# Altium PCB Board_QFP.PcbDoc (part 3 of 4)
Units mm, origin at the board's own origin, x right, y up, seen from the top; angles counter-clockwise.
Board outline 237 x 100 mm, 2 copper layers (Top Layer, Bottom Layer); 389 components, 358 nets, 1412 pads, 469 vias.
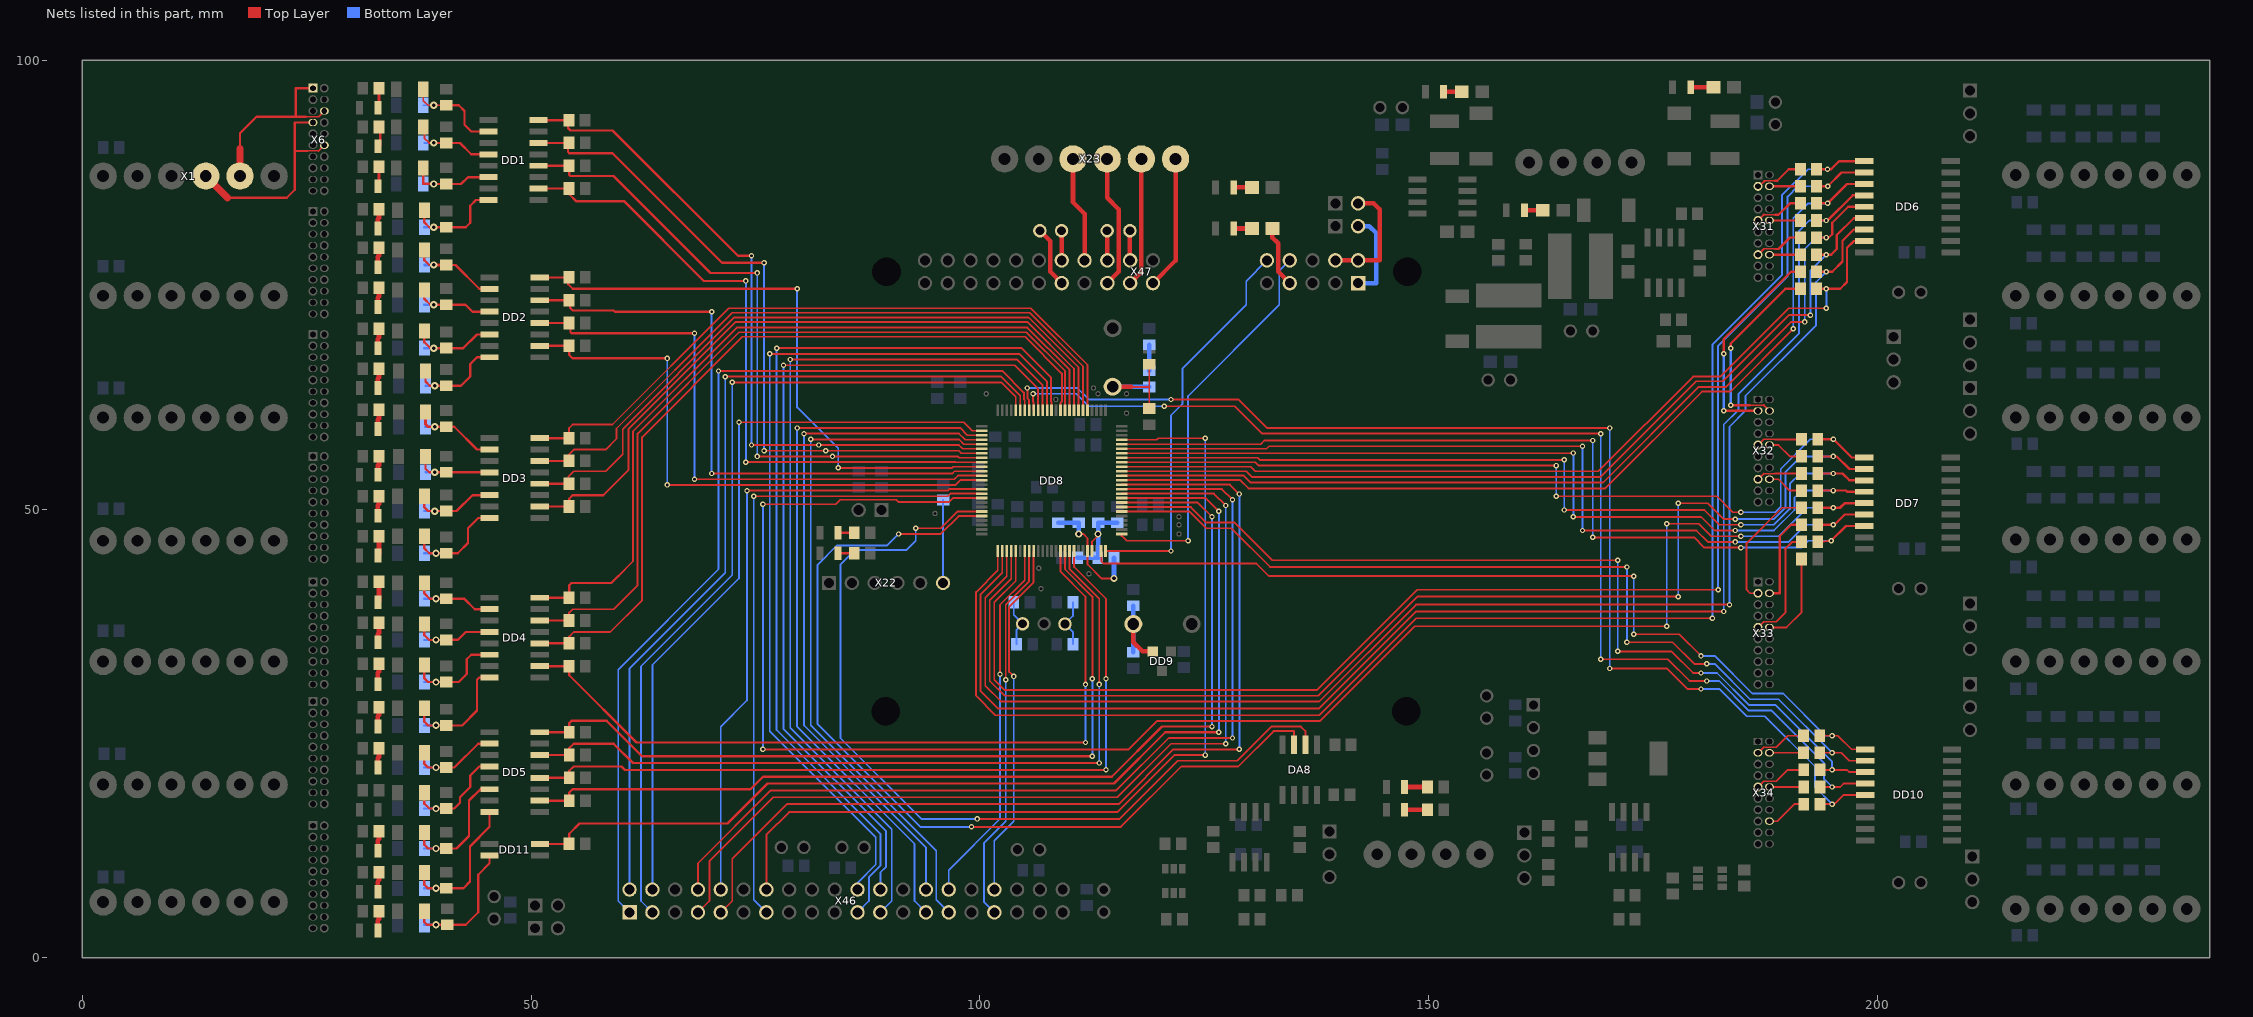
[diagram p3: the nets of this part, all layers, seen from the top]

## Via types
v1: diameter 0.6, hole 0.3, Top Layer to Bottom Layer, 149 vias
v2: diameter 0.813, hole 0.406, Top Layer to Bottom Layer, 130 vias
v3: diameter 1, hole 0.6, Top Layer to Bottom Layer, 118 vias
v4: diameter 1.016, hole 0.61, Top Layer to Bottom Layer, 72 vias

## Nets (pads, with @x,y where several pads share a name; then routed paths per layer and width w, separated by ;. In a path a pad name is that pad's centre, name@x,y a point inside that pad or via, vN(x,y) a via of type N, cw(c..) or ccw(c..) an arc to the next point about the centre after c; other vN are vias at no path point) (continued)
pa1: DD8.24 DD10.1 R99.1 | length 100.1
  Top Layer w0.203: DD8.24@113.481,45.339 113.538,45.282 113.538,44.196 113.792,43.942 130.81,43.942 132.207,42.545 v1(172.847,42.545) ; v1(172.847,36.068) 177.927,36.068 v1(180.34,33.655) ; R99.1@193.57,24.765 v1(194.945,24.765) 195.59,24.765 197.109,23.246 DD10.1@198.649,23.246
  Bottom Layer w0.203: v1(172.847,36.068) v1(172.847,42.545) ; v1(180.34,33.655) 181.864,33.655 186.055,29.464 189.484,29.464 194.183,24.765 v1(194.945,24.765)
pa2: DD8.25 X47.10 | length 44.1
  Top Layer w0.203: DD8.25@113.981,45.339 v1(121.285,45.339)
  Bottom Layer w0.203: v1(121.285,45.339) 121.285,60.452 122.555,61.722 122.555,65.659 129.667,72.771 129.667,75.422 X47.10@131.974,77.729
pa3: DD8.26 X47.8 | length 43.8
  Top Layer w0.203: DD8.26@115.781,47.239 115.781,47.033 116.332,46.482 v1(123.19,46.482)
  Bottom Layer w0.203: v1(123.19,46.482) 123.19,62.611 133.35,72.771 133.35,76.565 X47.8@134.514,77.729
pa4: 
pa5: 
pa6: DD8.31 DD10.2 R100.1 | length 100.7
  Top Layer w0.203: DD8.31@115.781,49.739 123.362,49.739 125.222,47.879 128.016,47.879 132.334,43.561 v1(172.085,43.561) ; v1(172.085,35.179) 177.165,35.179 179.578,32.766 v1(180.975,32.766) ; R100.1@193.57,22.86 v1(194.945,22.86) 195.971,22.86 196.855,21.976 DD10.2@198.649,21.976
  Bottom Layer w0.203: v1(172.085,35.179) v1(172.085,43.561) ; v1(180.975,32.766) 181.864,32.766 185.801,28.829 188.976,28.829 v1(194.945,22.86)
pa7: DD8.32 DD10.3 R168.1 | length 102.9
  Top Layer w0.203: DD8.32@115.781,50.239 123.497,50.239 125.222,48.514 128.397,48.514 132.588,44.323 v1(171.069,44.323) ; v1(171.069,34.163) 177.038,34.163 179.451,31.75 v1(180.34,31.75) ; R168.1@193.597,20.955 v1(194.945,20.955) 196.606,20.955 196.855,20.706 DD10.3@198.649,20.706
  Bottom Layer w0.203: v1(171.069,34.163) v1(171.069,44.323) ; v1(180.34,31.75) 182.118,31.75 185.674,28.194 188.595,28.194 194.945,21.844 v1(194.945,20.955)
pa8: DD8.67 DD10.4 R169.1 | length 130
  Top Layer w0.203: v1(105.918,62.865) 105.918,61.976 105.981,61.913 DD8.67@105.981,61.039 ; v1(120.523,61.468) 128.397,61.468 131.445,58.42 v1(169.164,58.42) ; v1(169.164,33.274) 176.657,33.274 179.07,30.861 v1(180.975,30.861) ; R169.1@193.595,19.048 v1(194.945,19.048) 195.832,19.048 196.22,19.436 DD10.4@198.649,19.436
  Bottom Layer w0.203: v1(105.918,62.865) 110.744,62.865 112.141,61.468 v1(120.523,61.468) ; v1(169.164,33.274) v1(169.164,58.42) ; v1(180.975,30.861) 182.372,30.861 185.674,27.559 188.214,27.559 194.056,21.717 194.056,19.937 v1(194.945,19.048)
pa9: DD8.68 DD10.5 R170.1 | length 133.9
  Top Layer w0.203: v1(105.283,63.5) 105.283,62.357 105.481,62.159 DD8.68@105.481,61.039 ; v1(121.285,62.23) 128.778,62.23 131.953,59.055 v1(170.18,59.055) ; v1(170.18,32.258) 176.53,32.258 178.816,29.972 v1(180.34,29.972) ; R170.1@193.595,17.143 v1(194.945,17.143) 195.197,17.143 196.22,18.166 DD10.5@198.649,18.166
  Bottom Layer w0.203: v1(105.283,63.5) 110.871,63.5 112.141,62.23 v1(121.285,62.23) ; v1(170.18,32.258) v1(170.18,59.055) ; v1(180.34,29.972) 182.372,29.972 185.42,26.924 187.452,26.924 193.04,21.336 193.04,19.048 v1(194.945,17.143)
pa10: DD8.69 X46.1 | length 102.5
  Top Layer w0.203: v1(70.866,65.405) 102.489,65.405 104.902,62.992 104.902,62.239 104.981,62.16 DD8.69@104.981,61.039
  Bottom Layer w0.203: X46.1@60.96,5.08 59.69,6.35 59.69,32.131 70.866,43.307 v1(70.866,65.405)
pa11: DD8.70 X46.2 | length 96.9
  Top Layer w0.203: v1(71.628,64.77) 102.362,64.77 104.481,62.651 DD8.70@104.481,61.039
  Bottom Layer w0.203: X46.2@60.96,7.62 60.96,32.258 71.628,42.926 v1(71.628,64.77)
pa12: DD8.71 X46.3 | length 97.5
  Top Layer w0.203: v1(72.39,64.135) 102.362,64.135 103.981,62.516 DD8.71@103.981,61.039
  Bottom Layer w0.203: X46.3@63.5,5.08 62.23,6.35 62.23,32.512 72.39,42.672 v1(72.39,64.135)
pa15: DD8.77 X46.4 | length 83.5
  Top Layer w0.203: v1(73.152,59.69) 98.171,59.69 99.122,58.739 DD8.77@100.181,58.739
  Bottom Layer w0.203: X46.4@63.5,7.62 63.5,32.639 73.152,42.291 v1(73.152,59.69)
pb0: DD8.35 X46.7 | length 107.9
  Top Layer w0.203: X46.7@68.58,5.08 69.85,6.35 69.85,10.795 76.962,17.907 115.316,17.907 121.285,23.876 v1(127.381,23.876) ; DD8.35@115.781,51.739 126.061,51.739 v1(127.381,50.419)
  Bottom Layer w0.203: v1(127.381,23.876) v1(127.381,50.419)
pb1: DD8.36 X46.8 | length 107.7
  Top Layer w0.203: X46.8@68.58,7.62 68.58,10.541 76.708,18.669 115.189,18.669 121.031,24.511 v1(128.143,24.511) ; DD8.36@115.781,52.239 126.958,52.239 v1(128.143,51.054)
  Bottom Layer w0.203: v1(128.143,24.511) v1(128.143,51.054)
pb2: DD8.37 X46.9 | length 110.1
  Top Layer w0.203: X46.9@71.12,5.08 72.39,6.35 72.39,11.049 78.486,17.145 115.443,17.145 121.539,23.241 v1(128.905,23.241) ; DD8.37@115.781,52.739 127.855,52.739 v1(128.905,51.689)
  Bottom Layer w0.203: v1(128.905,23.241) v1(128.905,51.689)
pb4: DD8.90 X46.10 | length 71.9
  Top Layer w0.203: v1(74.041,52.07) 96.393,52.07 96.562,52.239 DD8.90@100.181,52.239
  Bottom Layer w0.203: X46.10@71.12,7.62 71.12,25.781 74.041,28.702 v1(74.041,52.07)
pb5: DD8.91 X46.13 | length 72.4
  Top Layer w0.203: v1(74.803,51.435) 96.393,51.435 96.697,51.739 DD8.91@100.181,51.739
  Bottom Layer w0.203: v1(74.803,51.435) 74.803,6.477 X46.13@76.2,5.08
PB6: DD7.5 DD8.92 R90.1 | length 195.8
  Top Layer w0.203: v1(75.819,23.241) 116.586,23.241 119.761,26.416 137.922,26.416 148.463,36.957 v1(176.53,36.957) ; v1(75.819,50.546) 83.947,50.546 84.455,51.054 90.678,51.054 90.932,50.8 96.52,50.8 96.959,51.239 DD8.92@100.181,51.239 ; v1(176.53,48.387) 180.086,48.387 181.483,46.99 v1(184.785,46.99)
  Top Layer w0.305: R90.1@193.34,50.168 v1(195.072,50.168) 195.853,50.168 196.363,50.678 DD7.5@198.522,50.678
  Bottom Layer w0.203: v1(75.819,23.241) v1(75.819,50.546) ; v1(176.53,36.957) v1(176.53,48.387) ; v1(184.785,46.99) 188.976,46.99 192.154,50.168 v1(195.072,50.168)
pb8: DA8.2 DD8.95 | length 99.8
  Top Layer w0.203: v1(92.837,47.879) 95.631,47.879 97.491,49.739 DD8.95@100.181,49.739 ; v1(99.695,15.494) 115.57,15.494 122.047,21.971 128.651,21.971 132.461,25.781 135.763,25.781 136.271,25.273 DA8.2@136.271,23.749
  Bottom Layer w0.203: v1(92.837,47.879) 92.837,46.482 91.821,45.466 86.106,45.466 84.455,43.815 84.455,24.511 93.472,15.494 v1(99.695,15.494)
pb9: DA8.3 DD8.96 | length 102.1
  Top Layer w0.203: v1(90.932,47.244) 95.631,47.244 97.626,49.239 DD8.96@100.181,49.239 ; v1(99.06,14.605) 115.697,14.605 122.428,21.336 128.778,21.336 132.715,25.273 135.001,25.273 DA8.3@135.001,23.749
  Bottom Layer w0.203: v1(90.932,47.244) 89.662,45.974 84.074,45.974 81.915,43.815 81.915,26.035 93.345,14.605 v1(99.06,14.605)
pb10: DD8.47 X46.14 | length 103.4
  Top Layer w0.203: X46.14@76.2,7.62 76.2,13.716 78.74,16.256 115.316,16.256 121.666,22.606 v1(125.095,22.606) ; DD8.47@115.781,57.739 119.715,57.739 119.888,57.912 v1(125.095,57.912)
  Bottom Layer w0.203: v1(125.095,22.606) v1(125.095,57.912)
pc0: DD4.10 DD8.15 R171.1 | length 87.4
  Top Layer w0.203: DD8.15@108.981,45.339 108.981,43.038 111.76,40.259 v1(111.76,30.48)
  Top Layer w0.254: DD4.10@50.948,32.517 R171.1@54.225,32.517 ; R171.1@54.225,32.519 R171.1@54.225,32.517 ; v1(111.76,24.003) 61.722,24.003 54.225,31.5 R171.1@54.225,32.517
  Bottom Layer w0.203: v1(111.76,24.003) v1(111.76,30.48)
pc1: DD5.16 DD8.16 R172.1 | length 88.5
  Top Layer w0.203: DD8.16@109.481,45.339 109.481,43.314 109.474,43.307 112.522,40.259 v1(112.522,31.115)
  Top Layer w0.254: DD5.16@50.948,25.151 R172.1@54.25,25.151 54.25,26.183 54.483,26.416 58.42,26.416 62.357,22.479 v1(112.522,22.479)
  Bottom Layer w0.203: v1(112.522,22.479) v1(112.522,31.115)
pc2: DD5.14 DD8.17 R197.1 | length 89.2
  Top Layer w0.203: DD8.17@109.981,45.339 109.981,43.308 113.284,40.005 v1(113.284,30.48)
  Top Layer w0.254: DD5.14@50.948,22.611 R197.1@54.25,22.611 54.25,23.389 54.737,23.876 59.182,23.876 61.341,21.717 v1(113.284,21.717)
  Bottom Layer w0.203: v1(113.284,21.717) v1(113.284,30.48)
pc3: DD5.12 DD8.18 R198.1 | length 90.1
  Top Layer w0.203: DD8.18@110.481,45.339 110.481,43.57 114.046,40.005 v1(114.046,31.115)
  Top Layer w0.254: DD5.12@50.948,20.071 R198.1@54.25,20.071 54.25,20.849 54.737,21.336 60.071,21.336 60.452,20.955 v1(114.046,20.955)
  Bottom Layer w0.203: v1(114.046,20.955) v1(114.046,31.115)
pc4: DD5.10 DD8.33 R199.1 | length 113
  Top Layer w0.203: DD8.33@115.781,50.739 124.267,50.739 v1(125.857,49.149)
  Top Layer w0.254: DD5.10@50.948,17.531 R199.1@54.25,17.531 54.25,18.436 54.61,18.796 74.422,18.796 75.819,20.193 114.681,20.193 120.269,25.781 v1(125.857,25.781)
  Bottom Layer w0.203: v1(125.857,25.781) v1(125.857,49.149)
pc5: DD8.34 DD11.4 R200.1 | length 117.6
  Top Layer w0.203: DD8.34@115.781,51.239 125.164,51.239 v1(126.619,49.784)
  Top Layer w0.254: DD11.4@50.954,12.705 R200.1@54.223,12.705 ; R200.1@54.225,12.707 54.225,13.839 55.372,14.986 71.882,14.986 76.327,19.431 114.935,19.431 120.65,25.146 v1(126.619,25.146)
  Bottom Layer w0.203: v1(126.619,25.146) v1(126.619,49.784)
pc6: DD8.63 X46.21 | length 104.3
  Top Layer w0.203: v1(77.343,67.945) 104.648,67.945 107.906,64.687 107.906,62.002 107.961,61.947 107.961,61.849 107.981,61.849 DD8.63@107.981,61.039
  Bottom Layer w0.203: v1(77.343,67.945) 77.343,25.4 88.9,13.843 88.9,10.287 87.63,9.017 87.63,6.35 X46.21@86.36,5.08
pc7: DD8.64 X46.22 | length 100.8
  Top Layer w0.203: v1(76.581,67.31) 104.394,67.31 107.481,64.223 DD8.64@107.481,61.039
  Bottom Layer w0.203: v1(76.581,67.31) 76.581,25.273 88.392,13.462 88.392,10.414 86.36,8.382 X46.22@86.36,7.62
pc8: DD8.65 X46.23 | length 98.9
  Top Layer w0.203: v1(78.867,66.675) 104.14,66.675 106.981,63.834 DD8.65@106.981,61.039
  Bottom Layer w0.203: v1(78.867,66.675) 78.867,25.654 90.17,14.351 90.17,6.35 X46.23@88.9,5.08
pc9: DD8.66 X46.24 | length 95.3
  Top Layer w0.203: v1(78.105,66.04) 103.886,66.04 106.481,63.445 DD8.66@106.481,61.039
  Bottom Layer w0.203: v1(78.105,66.04) 78.105,25.527 89.535,14.097 89.535,10.16 88.9,9.525 X46.24@88.9,7.62
pc10: DD8.78 X46.27 | length 80.8
  Top Layer w0.203: v1(79.629,59.055) 97.79,59.055 98.606,58.239 DD8.78@100.181,58.239
  Bottom Layer w0.203: v1(79.629,59.055) 79.629,25.781 92.71,12.7 92.71,6.35 X46.27@93.98,5.08
pc11: DD8.79 X46.28 | length 76.5
  Top Layer w0.203: v1(80.391,58.42) 97.663,58.42 98.344,57.739 DD8.79@100.181,57.739
  Bottom Layer w0.203: v1(80.391,58.42) 80.391,25.908 93.98,12.319 X46.28@93.98,7.62
pc12: DD8.80 X46.29 | length 78.3
  Top Layer w0.203: v1(81.153,57.785) 97.663,57.785 98.209,57.239 DD8.80@100.181,57.239
  Bottom Layer w0.203: v1(81.153,57.785) 81.153,25.908 95.123,11.938 95.123,6.477 X46.29@96.52,5.08
pc13: DD8.7 X46.30 | length 41.2
  Top Layer w0.203: v1(102.235,31.623) 102.235,39.339 104.981,42.085 DD8.7@104.981,45.339
  Bottom Layer w0.203: X46.30@96.52,7.62 96.52,9.779 102.235,15.494 v1(102.235,31.623)
pc14: DD8.8 X46.33 | length 42.8
  Top Layer w0.203: v1(102.87,30.988) 102.87,39.37 105.481,41.981 DD8.8@105.481,45.339
  Bottom Layer w0.203: X46.33@101.6,5.08 100.457,6.223 100.457,12.827 102.87,15.24 v1(102.87,30.988)
pc15: DD8.9 X46.34 | length 40
  Top Layer w0.203: v1(103.759,31.369) 103.251,31.877 103.251,39.116 105.981,41.846 DD8.9@105.981,45.339
  Bottom Layer w0.203: X46.34@101.6,7.62 101.6,13.081 103.759,15.24 v1(103.759,31.369)
PD0: DD1.16 DD8.81 R13.1 | length 77.4
  Top Layer w0.203: v1(74.549,57.15) v1(82.042,57.15) 97.663,57.15 98.074,56.739 DD8.81@100.181,56.739
  Top Layer w0.254: DD1.16@50.821,93.35 R13.1@54.096,93.35 ; R13.1@54.098,93.352 54.098,92.486 54.377,92.207 59.055,92.207 73.03,78.232 v1(74.549,78.232)
  Bottom Layer w0.203: v1(74.549,57.15) v1(74.549,78.232)
PD1: DD1.14 DD8.82 R14.1 | length 76.5
  Top Layer w0.203: v1(75.946,56.515) v1(82.804,56.515) 97.663,56.515 97.939,56.239 DD8.82@100.181,56.239
  Top Layer w0.254: DD1.14@50.821,90.81 R14.1@54.096,90.81 ; R14.1@54.098,90.812 54.098,89.819 54.25,89.667 59.055,89.667 71.252,77.47 v1(75.946,77.47)
  Bottom Layer w0.203: v1(75.946,56.515) v1(75.946,77.47)
PD2: DD1.12 DD8.83 R15.1 | length 75.4
  Top Layer w0.203: v1(75.184,55.88) v1(83.566,55.88) 97.536,55.88 97.677,55.739 DD8.83@100.181,55.739
  Top Layer w0.254: DD1.12@50.821,88.27 R15.1@54.223,88.27 ; R15.1@54.225,88.272 54.225,87.279 54.377,87.127 59.182,87.127 69.982,76.327 v1(75.184,76.327)
  Bottom Layer w0.203: v1(75.184,55.88) v1(75.184,76.327)
PD3: DD1.10 DD8.84 R28.1 | length 74.2
  Top Layer w0.203: v1(73.914,55.245) 97.282,55.245 97.288,55.239 DD8.84@100.181,55.239
  Top Layer w0.254: DD1.10@50.821,85.73 R28.1@54.225,85.73 ; R28.1@54.225,85.732 R28.1@54.225,85.73 ; v1(73.914,75.438) 69.215,75.438 60.325,84.328 54.991,84.328 54.225,85.094 R28.1@54.225,85.73
  Bottom Layer w0.203: v1(73.914,55.245) v1(73.914,75.438)
PD4: DD2.16 DD8.85 R29.1 | length 67.5
  Top Layer w0.203: v1(84.201,54.61) 96.901,54.61 97.03,54.739 DD8.85@100.181,54.739
  Top Layer w0.254: DD2.16@50.948,75.824 54.123,75.824 54.123,75.062 54.631,74.554 v1@79.629,74.554
  Bottom Layer w0.203: v1(79.629,74.549) 79.629,61.341 84.201,56.769 v1(84.201,54.61)
PD5: DD2.14 DD8.86 R30.1 | length 68.4
  Top Layer w0.203: v1(70.104,53.975) 96.901,53.975 97.165,54.239 DD8.86@100.181,54.239
  Top Layer w0.254: DD2.14@50.948,73.284 54.35,73.284 54.35,72.422 54.631,72.141 59.203,72.141 59.335,72.009 v1(70.104,72.009)
  Bottom Layer w0.203: v1(70.104,53.975) v1(70.104,72.009)
PD6: DD2.12 DD8.87 R43.1 | length 66.7
  Top Layer w0.203: v1(68.199,53.34) 97.155,53.34 97.554,53.739 DD8.87@100.181,53.739
  Top Layer w0.254: DD2.12@50.948,70.744 54.377,70.744 54.377,69.728 54.504,69.601 68.194,69.601 v1(68.199,69.596)
  Bottom Layer w0.203: v1(68.199,53.34) v1(68.199,69.596)
PD7: DD2.10 DD8.88 R44.1 | length 64.7
  Top Layer w0.203: v1(65.151,52.705) 97.282,52.705 97.816,53.239 DD8.88@100.181,53.239
  Top Layer w0.254: DD2.10@50.948,68.204 54.25,68.204 54.25,67.188 54.631,66.807 65.146,66.807 v1(65.151,66.802)
  Bottom Layer w0.203: v1(65.151,52.705) v1(65.151,66.802)
PD8: DD3.16 DD8.55 R45.1 | length 75.4
  Top Layer w0.203: R45.1@54.225,57.919 54.225,59.051 54.61,59.436 59.055,59.436 72.009,72.39 105.664,72.39 111.981,66.073 DD8.55@111.981,61.039
  Top Layer w0.254: DD3.16@50.948,57.917 R45.1@54.25,57.917
PD9: DD3.14 DD8.56 R58.1 | length 75.8
  Top Layer w0.203: R58.1@54.225,55.379 54.225,56.13 54.737,56.642 58.293,56.642 59.499,57.848 59.499,58.991 72.39,71.882 105.537,71.882 111.481,65.938 DD8.56@111.481,61.039
  Top Layer w0.254: DD3.14@50.948,55.377 R58.1@54.223,55.377
PD10: DD3.12 DD8.57 R59.1 | length 76.9
  Top Layer w0.203: R59.1@54.123,52.837 54.123,53.615 54.737,54.229 58.293,54.229 60.198,56.134 60.198,58.928 72.644,71.374 105.41,71.374 110.981,65.803 DD8.57@110.981,61.039
  Top Layer w0.254: DD3.12@50.948,52.837 R59.1@54.123,52.837
PD11: DD3.10 DD8.58 R60.1 | length 77.9
  Top Layer w0.203: 58.039,51.562 60.833,54.356 60.833,58.928 72.771,70.866 105.283,70.866 110.481,65.668 DD8.58@110.481,61.039
  Top Layer w0.254: DD3.10@50.948,50.297 R60.1@54.123,50.297 ; R60.1@54.225,50.299 54.225,51.177 54.61,51.562 58.039,51.562
PD12: DD4.16 DD8.59 R73.1 | length 87.2
  Top Layer w0.203: 59.69,42.545 61.341,44.196 61.341,58.674 72.898,70.231 105.283,70.231 109.981,65.533 DD8.59@109.981,61.039
  Top Layer w0.254: DD4.16@50.948,40.137 R73.1@54.223,40.137 ; R73.1@54.225,40.139 54.225,41.525 54.483,41.783 58.928,41.783 59.69,42.545
PD13: DD4.14 DD8.60 R74.1 | length 88.4
  Top Layer w0.203: R74.1@54.225,37.599 54.225,38.477 54.61,38.862 59.182,38.862 61.849,41.529 61.849,58.42 73.152,69.723 105.156,69.723 109.481,65.398 DD8.60@109.481,61.039
  Top Layer w0.254: DD4.14@50.948,37.597 R74.1@54.223,37.597
PD14: DD4.12 DD8.61 R75.1 | length 89.1
  Top Layer w0.203: R75.1@54.225,35.059 54.225,35.81 54.737,36.322 58.801,36.322 62.357,39.878 62.357,58.039 73.533,69.215 105.029,69.215 109.128,65.116 109.128,62.011 108.981,61.864 DD8.61@108.981,61.039
  Top Layer w0.254: DD4.12@50.948,35.057 R75.1@54.123,35.057
PE2: DD6.1 DD8.1 R76.1 | length 166.8
  Top Layer w0.203: DD8.1@101.981,45.339 101.981,43.18 99.568,40.767 99.568,29.21 101.727,27.051 137.795,27.051 148.59,37.846 v1(181.61,37.846)
  Top Layer w0.254: R76.1@193.213,87.887 v1(194.437,87.887) 194.837,87.887 195.728,88.778 DD6.1@198.522,88.778
  Bottom Layer w0.203: v1(181.61,37.846) 181.61,68.326 189.357,76.073 189.357,84.963 192.281,87.887 v1(194.437,87.887)
PE3: DD6.4 DD8.2 R81.1 | length 160.6
  Top Layer w0.203: DD8.2@102.481,45.339 102.481,42.918 100.076,40.513 100.076,29.718 101.981,27.813 137.795,27.813 148.59,38.608 v1(182.88,38.608)
  Top Layer w0.254: R81.1@193.213,82.172 v1(194.31,82.172) 194.44,82.172 197.236,84.968 DD6.4@198.522,84.968
  Bottom Layer w0.203: v1(182.88,38.608) 182.88,59.436 184.531,61.087 184.531,62.865 191.262,69.596 191.262,81.026 192.408,82.172 v1(194.31,82.172)
PE4: DD6.7 DD8.3 R84.1 | length 154.3
  Top Layer w0.203: DD8.3@102.981,45.339 102.981,42.529 100.584,40.132 100.584,30.353 102.362,28.575 137.795,28.575 148.59,39.37 v1(183.515,39.37)
  Top Layer w0.254: R84.1@193.213,76.457 v1(194.31,76.457) 194.964,76.457 196.109,77.602 196.109,79.904 197.363,81.158 DD6.7@198.522,81.158
  Bottom Layer w0.203: v1(183.515,39.37) 183.515,59.182 185.293,60.96 185.293,62.611 193.167,70.485 193.167,75.314 v1(194.31,76.457)
PE5: DD7.2 DD8.4 R87.1 | length 136.8
  Top Layer w0.203: DD8.4@103.481,45.339 103.481,42.267 101.092,39.878 101.092,30.861 102.743,29.21 137.668,29.21 148.717,40.259 v1(177.8,40.259) ; v1(177.8,50.673) 181.102,50.673 182.88,48.895 v1(184.15,48.895)
  Top Layer w0.254: R87.1@193.34,55.883 v1(195.072,55.883) 195.476,55.883 196.871,54.488 DD7.2@198.522,54.488
  Bottom Layer w0.203: v1(177.8,40.259) v1(177.8,50.673) ; v1(184.15,48.895) 188.468,48.895 189.738,50.165 189.738,54.102 191.519,55.883 v1(195.072,55.883)
PE6: DD6.2 DD8.5 R79.1 | length 159
  Top Layer w0.203: DD8.5@103.981,45.339 103.981,42.005 101.6,39.624 101.6,30.988 102.743,29.845 137.541,29.845 148.717,41.021 v1(182.245,41.021)
  Top Layer w0.254: R79.1@193.213,85.982 v1(194.456,85.982) 195.982,87.508 DD6.2@198.522,87.508
  Bottom Layer w0.203: v1(182.245,41.021) 182.245,68.199 189.992,75.946 189.992,84.836 191.138,85.982 v1(194.456,85.982)
PE7: DD6.3 DD8.38 R80.1 | length 105.6
  Top Layer w0.203: DD8.38@115.781,53.239 129.006,53.239 129.921,52.324 169.672,52.324 180.467,63.119 183.642,63.119 v1(190.627,70.104)
  Top Layer w0.254: R80.1@193.213,84.077 v1(194.44,84.077) 196.601,86.238 DD6.3@198.522,86.238
  Bottom Layer w0.203: v1(190.627,70.104) 190.627,82.423 192.281,84.077 v1(194.44,84.077)
PE8: DD6.5 DD8.39 R82.1 | length 102.4
  Top Layer w0.203: DD8.39@115.781,53.739 129.395,53.739 130.175,52.959 169.418,52.959 180.086,63.627 183.134,63.627 190.373,70.866 v1(191.897,70.866)
  Top Layer w0.254: R82.1@193.213,80.267 v1(194.31,80.267) 194.583,80.267 194.966,80.65 194.966,81.92 196.744,83.698 DD6.5@198.522,83.698
  Bottom Layer w0.203: v1(191.897,70.866) 191.897,78.994 193.17,80.267 v1(194.31,80.267)
PE9: DD6.6 DD8.40 R83.1 | length 99.9
  Top Layer w0.203: DD8.40@115.781,54.239 129.657,54.239 130.302,53.594 169.164,53.594 179.832,64.262 182.753,64.262 190.119,71.628 v1(192.532,71.628)
  Top Layer w0.254: R83.1@193.213,78.362 v1(194.31,78.362) 194.837,78.362 195.474,78.999 195.474,80.539 197.363,82.428 DD6.6@198.522,82.428
  Bottom Layer w0.203: v1(192.532,71.628) 192.532,76.584 v1(194.31,78.362)
PE10: DD6.8 DD8.41 R85.1 | length 98.2
  Top Layer w0.203: DD8.41@115.781,54.739 130.173,54.739 130.683,54.229 168.91,54.229 179.451,64.77 182.499,64.77 190.119,72.39 v1(194.31,72.39)
  Top Layer w0.254: R85.1@193.213,74.552 v1(194.31,74.552) 195.853,74.552 196.617,75.316 196.617,79.126 197.379,79.888 DD6.8@198.522,79.888
  Bottom Layer w0.203: v1(194.31,72.39) v1(194.31,74.552)
PE11: DD7.1 DD8.42 R86.1 | length 95.5
  Top Layer w0.203: DD8.42@115.781,55.239 130.689,55.239 131.064,54.864 v1(164.211,54.864) ; v1(164.211,51.435) 182.118,51.435 183.896,49.657 v1(184.785,49.657)
  Top Layer w0.254: R86.1@193.34,57.788 v1(195.095,57.788) 197.125,55.758 DD7.1@198.522,55.758
  Bottom Layer w0.203: v1(164.211,51.435) v1(164.211,54.864) ; v1(184.785,49.657) 188.595,49.657 189.23,50.292 189.23,54.483 192.535,57.788 v1(195.095,57.788)
PE12: DD7.3 DD8.43 R88.1 | length 95.2
  Top Layer w0.203: DD8.43@115.781,55.739 130.951,55.739 131.191,55.499 v1(165.1,55.499) ; v1(165.1,49.911) 180.721,49.911 182.372,48.26 v1(184.785,48.26)
  Top Layer w0.254: R88.1@193.34,53.978 v1(195.072,53.978) 196.111,53.978 196.871,53.218 DD7.3@198.522,53.218
  Bottom Layer w0.203: v1(165.1,49.911) v1(165.1,55.499) ; v1(184.785,48.26) 188.468,48.26 190.246,50.038 190.246,52.832 191.389,53.975 191.891,53.975 191.894,53.978 v1(195.072,53.978)
PE13: DD7.4 DD8.44 R89.1 | length 94.9
  Top Layer w0.203: DD8.44@115.781,56.239 166.094,56.239 v1(166.116,56.261) ; v1(166.116,49.149) 180.34,49.149 181.864,47.625 v1(184.15,47.625)
  Top Layer w0.254: R89.1@193.342,52.075 v1(195.072,52.075) 196.49,52.075 196.617,51.948 DD7.4@198.522,51.948
  Bottom Layer w0.203: v1(166.116,49.149) v1(166.116,56.261) ; v1(184.15,47.625) 188.468,47.625 190.754,49.911 190.754,51.308 191.521,52.075 v1(195.072,52.075)
PE14: DD7.6 DD8.45 R91.1 | length 95.8
  Top Layer w0.203: DD8.45@115.781,56.739 131.923,56.739 132.207,57.023 v1(167.132,57.023) ; v1(167.132,47.625) 179.832,47.625 181.102,46.355 v1(184.15,46.355)
  Top Layer w0.254: R91.1@193.34,48.263 v1(195.072,48.263) 195.218,48.263 196.363,49.408 DD7.6@198.522,49.408
  Bottom Layer w0.203: v1(167.132,47.625) v1(167.132,57.023) ; v1(184.15,46.355) 190.119,46.355 192.027,48.263 v1(195.072,48.263)
PE15: DD7.7 DD8.46 R92.1 | length 96.7
  Top Layer w0.203: DD8.46@115.781,57.239 131.28,57.239 131.699,57.658 v1(168.275,57.658) ; v1(168.275,46.863) 179.578,46.863 180.721,45.72 v1(184.785,45.72)
  Top Layer w0.254: R92.1@193.34,46.358 v1(194.837,46.485) 196.49,48.138 DD7.7@198.522,48.138
  Bottom Layer w0.203: v1(168.275,46.863) v1(168.275,57.658) ; v1(184.785,45.72) 191.513,45.72 192.278,46.485 v1(194.837,46.485)
pld1: J14.2 X47.2 X47.4 | length 13.3
  Top Layer w0.508: X47.4@139.594,77.729 X47.2@142.134,77.729 144.521,77.729 144.521,83.434 143.886,84.069 ; J14.2@142.139,84.074 143.891,84.074
pld2: J15.2 X47.1 | length 9.9
  Bottom Layer w0.508: X47.1@142.134,75.189 144.14,75.189 144.14,80.777 143.378,81.539 J15.2@142.134,81.539
pld8: R131.1 X47.7 | length 6.9
  Top Layer w0.508: R131.1@132.588,81.28 132.588,80.264 133.223,79.629 133.223,76.48 X47.7@134.514,75.189
pld8_r: R131.2 VD43.2 | length 2
  Top Layer w0.508: VD43.2@128.27,81.28 R131.2@130.302,81.28
pld21: pad.2 X47.22 | length 3.3
  Top Layer w0.508: X47.22@116.713,77.75 pad.2@116.713,81.026
pld23: pad.3 X47.24 | length 3.3
  Top Layer w0.508: X47.24@114.173,77.75 pad.3@114.173,81.026
pld27: pad.4 X47.28 | length 3.3
  Top Layer w0.508: X47.28@109.114,77.729 pad.4@109.114,81.005
pld28: pad.5 X47.27 | length 6.8
  Top Layer w0.508: pad.5@106.68,81.026 107.823,79.883 107.823,76.48 X47.27@109.114,75.189
q1: C46.1 Q1.1 R147.2 | length 5.4
  Bottom Layer w0.203: R147.2@103.762,39.626 103.762,38.221 Q1.1@104.746,37.237 104.086,36.577 C46.1@104.086,34.949
q2: C47.1 Q1.2 R48.2@110.36,39.622 | length 5.4
  Bottom Layer w0.203: C47.1@110.359,34.953 110.359,36.323 Q1.2@109.47,37.212 110.36,38.101 R48.2@110.36,39.622
r4-1: DD1.2 R2.2 R3.2 R4.2 | length 11.4
  Top Layer w0.203: R3.2@37.97,96.779 37.97,95.533 38.502,95.001 v2(39.137,95.001) 39.856,95.001 R4.2@39.88,95.025
  Top Layer w0.254: R4.2@40.536,95.004 41.928,95.004 42.566,94.366 42.566,92.842 43.328,92.08 DD1.2@45.233,92.08
  Bottom Layer w0.203: R2.2@37.97,95.001 v2(39.137,95.001)
r8-1: DD1.4 R6.2 R7.2 R8.2 | length 9.5
  Top Layer w0.203: R7.2@38.097,92.588 38.097,91.342 38.626,90.813 v2(39.137,90.813) R8.2@39.901,90.813
  Top Layer w0.254: R8.2@40.536,90.813 42.055,90.813 43.328,89.54 DD1.4@45.233,89.54
  Bottom Layer w0.203: R6.2@38.097,90.81 38.1,90.813 v2(39.137,90.813)
r12-1: DD1.6 R10.2 R11.2 R12.2 | length 10.5
  Top Layer w0.254: R10.2@37.97,88.016 37.97,86.262 39.113,86.262 v2(39.137,86.238) 42.185,86.238 42.947,87 DD1.6@45.233,87
  Bottom Layer w0.254: R11.2@37.97,86.238 v2(39.137,86.238)
r19: DD1.8 R17.2 R18.2 R19.2 | length 12.1
  Top Layer w0.254: R17.2@38.097,83.317 38.097,81.944 38.629,81.412 v2(39.137,81.412) 42.693,81.412 43.201,81.92 43.201,83.825 43.836,84.46 DD1.8@45.233,84.46
  Bottom Layer w0.254: R18.2@38.097,81.412 v2(39.137,81.412)
r23: DD2.2 R21.2 R22.2 R23.2 | length 10.7
  Top Layer w0.254: R21.2@38.097,78.872 38.097,77.753 38.629,77.221 v2(39.137,77.221) ; R23.2@40.533,77.221 41.55,77.221 44.217,74.554 DD2.2@45.36,74.554
  Top Layer w0.305: v2(39.137,77.221) R23.2@40.533,77.221
  Bottom Layer w0.305: R22.2@38.097,77.221 v2(39.137,77.221)
r27: DD2.4 R25.2 R26.2 R27.2 | length 9.9
  Top Layer w0.254: R25.2@38.097,74.427 38.097,73.435 38.756,72.776 v2(39.137,72.776) R27.2@40.533,72.776 ; R27.2@40.536,72.779 42.69,72.779 43.455,72.014 DD2.4@45.36,72.014
  Bottom Layer w0.254: R26.2@38.097,72.776 v2(39.137,72.776)
r34: DD2.6 R32.2 R33.2 R34.2 | length 10.5
  Top Layer w0.254: R32.2@38.097,69.855 38.097,68.609 38.756,67.95 v2(39.137,67.95) 42.439,67.95 43.963,69.474 DD2.6@45.36,69.474
  Bottom Layer w0.254: R33.2@38.097,67.95 v2(39.137,67.95)
r38: DD2.8 R36.2 R37.2 R38.2 | length 11.7
  Top Layer w0.254: R36.2@38.224,65.41 38.224,64.243 38.708,63.759 v2(39.264,63.759) 42.185,63.759 43.201,64.775 43.201,66.172 43.963,66.934 DD2.8@45.36,66.934
  Bottom Layer w0.254: R37.2@38.224,63.759 v2(39.264,63.759)
r42: DD3.2 R40.2 R41.2 R42.2 | length 10.7
  Top Layer w0.254: R42.2@40.533,59.187 41.423,59.187 43.963,56.647 DD3.2@45.36,56.647
  Top Layer w0.305: R40.2@38.224,60.838 38.224,59.465 38.502,59.187 v2(39.264,59.187) R42.2@40.533,59.187
  Bottom Layer w0.305: R41.2@38.224,59.187 v2(39.264,59.187)
r49: DD3.4 R47.2 R48.2@38.224,54.107 R49.2 | length 9.7
  Top Layer w0.254: R47.2@38.224,55.885 38.224,54.512 38.629,54.107 v2(39.264,54.107) DD3.4@45.36,54.107
  Bottom Layer w0.254: R48.2@38.224,54.107 v2(39.264,54.107)
r53: DD3.6 R51.2 R52.2 R53.2 | length 10.6
  Top Layer w0.254: R51.2@38.097,51.44 38.097,50.194 38.502,49.789 v2(39.264,49.789) 41.677,49.789 43.455,51.567 DD3.6@45.36,51.567
  Bottom Layer w0.254: R52.2@38.097,49.789 v2(39.264,49.789)
r57: DD3.8 R55.2 R56.2 R57.2 | length 12.7
  Top Layer w0.254: R55.2@38.097,46.995 38.097,45.622 38.629,45.09 v2(39.391,45.09) 41.804,45.09 42.947,46.233 42.947,47.884 44.09,49.027 DD3.8@45.36,49.027
  Bottom Layer w0.254: R56.2@38.097,45.09 v2(39.391,45.09)
r64: DD4.2 R62.2 R63.2@38.097,40.01 R64.2 | length 10.5
  Top Layer w0.254: R62.2@38.097,41.788 38.097,40.621 38.708,40.01 v2(39.391,40.01) 42.566,40.01 43.709,38.867 DD4.2@45.36,38.867
  Bottom Layer w0.254: R63.2@38.097,40.01 v2(39.391,40.01)
r68: DD4.4 R66.2 R67.2 R68.2 | length 10.4
  Top Layer w0.254: R66.2@38.097,37.216 38.097,35.97 38.629,35.438 v2(39.391,35.438) R68.2@40.533,35.438 ; R68.2@40.536,35.441 41.807,35.441 42.693,36.327 DD4.4@45.36,36.327
  Bottom Layer w0.254: R67.2@38.097,35.438 v2(39.391,35.438)
r72: DD4.6 R70.2 R71.2 R72.2 | length 12.5
  Top Layer w0.254: R70.2@38.097,32.644 38.097,31.144 38.502,30.739 v2(39.391,30.739) R72.2@40.533,30.739 ; R72.2@40.536,30.742 41.934,30.742 42.82,31.628 42.82,33.279 43.328,33.787 DD4.6@45.36,33.787
  Bottom Layer w0.254: R71.2@38.097,30.739 v2(39.391,30.739)
r76: R76.2 X31.3 | length 5.5
  Top Layer w0.152: 187.386,86.553 187.438,86.605 188.586,86.605
  Top Layer w0.254: X31.3@186.69,85.979 186.812,85.979 187.386,86.553 ; 188.586,86.605 188.84,86.605 190.122,87.887 R76.2@191.413,87.887
r79: R79.2 X31.4 | length 3.4
  Top Layer w0.254: X31.4@187.96,85.979 R79.2@191.41,85.979
r80: R80.2 X31.9 | length 5.5
  Top Layer w0.152: 187.325,82.804 188.595,82.804
  Top Layer w0.254: X31.9@186.69,82.169 187.325,82.804 ; 188.595,82.804 188.976,82.804 190.249,84.077 R80.2@191.413,84.077
r81: R81.2 X31.10 | length 3.4
  Top Layer w0.254: X31.10@187.96,82.169 R81.2@191.41,82.169
r82: R82.2 X31.15 | length 5.5
  Top Layer w0.152: 187.325,78.994 188.595,78.994
  Top Layer w0.254: X31.15@186.69,78.359 187.325,78.994 ; 188.595,78.994 188.976,78.994 190.249,80.267 R82.2@191.413,80.267
r83: R83.2 X31.16 | length 3.4
  Top Layer w0.254: X31.16@187.96,78.359 R83.2@191.41,78.359
r84: R84.2 X32.3 | length 23.4
  Top Layer w0.254: v1(182.88,60.96) X32.3@186.69,60.96 ; v1(182.88,67.31) 182.88,68.961 190.376,76.457 R84.2@191.413,76.457
  Bottom Layer w0.254: v1(182.88,60.96) v1(182.88,67.31)
r85: R85.2 X32.4 | length 21.7
  Top Layer w0.152: 185.801,61.595 185.81,61.586 187.334,61.586 187.336,61.584
  Top Layer w0.254: v1(183.642,61.595) 185.801,61.595 ; v1(183.642,67.945) 183.642,68.453 189.741,74.552 R85.2@191.413,74.552 ; 187.336,61.584 X32.4@187.96,60.96
  Bottom Layer w0.254: v1(183.642,61.595) v1(183.642,67.945)
r86: R86.2 X32.9 | length 5.1
  Top Layer w0.152: 187.325,57.785 188.595,57.785
  Top Layer w0.203: X32.9@186.69,57.15 187.325,57.785 ; 188.595,57.785 R86.2@191.537,57.785
r87: R87.2 X32.10 | length 4.1
  Top Layer w0.203: X32.10@187.96,57.15 188.976,57.15 190.243,55.883 R87.2@191.54,55.883
r88: R88.2 X32.15 | length 5.1
  Top Layer w0.152: 187.325,53.975 188.595,53.975
  Top Layer w0.203: X32.15@186.69,53.34 187.325,53.975 ; 188.595,53.975 191.537,53.975 R88.2@191.54,53.978
r89: R89.2 X32.16 | length 4.1
  Top Layer w0.203: X32.16@187.96,53.34 188.976,53.34 190.243,52.073 R89.2@191.54,52.073
r90: R90.2 X33.3 | length 14.4
  Top Layer w0.203: X33.3@186.69,40.64 185.801,40.64 185.42,41.021 185.42,46.228 189.36,50.168 R90.2@191.54,50.168
r91: R91.2 X33.4 | length 10.5
  Top Layer w0.254: X33.4@187.96,40.64 189.103,40.64 189.103,46.99 190.376,48.263 R91.2@191.54,48.263
r92: R92.2 X33.9 | length 13
  Top Layer w0.152: 187.325,37.465 188.722,37.465
  Top Layer w0.203: X33.9@186.69,36.83 187.325,37.465 ; 188.722,37.465 189.738,38.481 189.738,45.593
  Top Layer w0.254: 189.738,45.593 190.503,46.358 R92.2@191.54,46.358
r93: R93.2 X33.10 | length 10.2
  Top Layer w0.203: X33.10@187.96,36.83 189.865,36.83 191.54,38.505 R93.2@191.54,44.453
r99: R99.2 X34.3 | length 5.9
  Top Layer w0.152: 187.325,23.495 188.722,23.495
  Top Layer w0.203: X34.3@186.69,22.86 187.325,23.495 ; 188.722,23.495 189.992,24.765 R99.2@191.77,24.765
r100: R100.2 X34.4 | length 3.8
  Top Layer w0.203: X34.4@187.96,22.86 R100.2@191.77,22.86
r168: R168.2 X34.9 | length 5.9
  Top Layer w0.152: 187.325,19.685 188.722,19.685
  Top Layer w0.203: X34.9@186.69,19.05 187.325,19.685 ; 188.722,19.685 189.99,20.953 R168.2@191.795,20.953
r169: R169.2 X34.10 | length 3.8
  Top Layer w0.203: X34.10@187.96,19.05 R169.2@191.793,19.05
r170: R170.2 X34.16 | length 4.6
  Top Layer w0.203: X34.16@187.96,15.24 188.849,15.24 190.752,17.143 R170.2@191.795,17.143
r176: DD4.8 R174.2 R175.2 R176.2 | length 14.4
  Top Layer w0.254: R174.2@38.097,27.818 38.097,26.318 38.502,25.913 v2(39.391,25.913) 42.312,25.913 43.963,27.564 43.963,30.993 44.217,31.247 DD4.8@45.36,31.247
  Bottom Layer w0.254: R175.2@38.097,25.913 v2(39.391,25.913)
r180: DD5.2 R177.2 R178.2 R180.2 | length 10.2
  Top Layer w0.254: R177.2@38.097,22.865 38.097,21.619 38.502,21.214 v2(39.391,21.214) R180.2@40.533,21.214 ; R180.2@40.536,21.217 41.426,21.217 44.09,23.881 DD5.2@44.471,23.881
  Bottom Layer w0.254: R178.2@38.097,21.214 v2(39.391,21.214)
r184: DD5.4 R181.2 R182.2 R184.2 | length 13.1
  Top Layer w0.254: R182.2@38.097,18.42 38.097,17.174 38.629,16.642 v2(39.391,16.642) R184.2@40.533,16.642 ; R184.2@40.536,16.645 41.42,16.645 42.058,17.283 42.058,17.912 43.201,19.055 43.201,20.325 44.217,21.341 DD5.4@45.36,21.341
  Bottom Layer w0.254: R181.2@38.097,16.642 v2(39.391,16.642)
r188: DD5.6 R185.2 R186.2 R188.2 | length 15.1
  Top Layer w0.254: R185.2@38.097,13.975 38.097,12.602 38.502,12.197 v2(39.391,12.197) R188.2@40.533,12.197 ; R188.2@40.536,12.2 41.674,12.2 43.074,13.6 43.074,17.531 44.344,18.801 DD5.6@45.36,18.801
  Bottom Layer w0.254: R186.2@38.097,12.197 v2(39.391,12.197)
r192: DD5.8 R189.2 R190.2 R192.2 | length 16.9
  Top Layer w0.254: R189.2@38.097,9.53 38.097,8.157 38.502,7.752 v2(39.391,7.752) 42.416,7.752 43.178,8.514 43.178,12.428 45.36,14.61 DD5.8@45.36,16.261
  Bottom Layer w0.254: R190.2@38.097,7.752 v2(39.391,7.752)
r196: DD11.2 R193.2 R194.2 R196.2 | length 16.1
  Top Layer w0.254: R193.2@38.097,5.212 38.097,3.966 38.375,3.688 v2(39.391,3.688) 42.693,3.688 44.09,5.085 44.09,9.276 45.354,10.54 DD11.2@45.354,11.435
  Bottom Layer w0.254: R194.2@38.097,3.688 v2(39.391,3.688)
rst: DD9.2 R129.2 R130.1 SA1.1 | length 9.8
  Top Layer w0.508: SA1.1@117.094,37.211 117.094,35.179 118.11,34.163 DD9.2@119.253,34.163
  Bottom Layer w0.508: R129.2@117.092,39.246 117.092,37.213 SA1.1@117.094,37.211 R130.1@117.094,34.063
sa2_1: C49.2 R155.2 R156.1 SA2.1 | length 13.1
  Top Layer w0.203: 116.84,63.627 118.821,63.627 ; R155.2@118.87,61.211 R156.1@118.87,66.142
  Top Layer w0.508: SA2.1@114.779,63.653 116.814,63.653 116.84,63.627
  Bottom Layer w0.508: SA2.1@114.779,63.653 C49.2@118.847,63.653
sa2_2: C49.1 R154.2 | length 2.9
  Bottom Layer w0.508: C49.1@118.87,65.43 R154.2@118.87,68.329
spi_clk: X23.3 X47.23 | length 14.9
  Top Layer w0.508: X23.3@114.173,89.027 114.173,84.709 115.443,83.439 115.443,76.438 X47.23@114.194,75.189
spi_en: X23.4 X47.26 | length 11.8
  Top Layer w0.508: X23.4@110.363,89.027 110.363,84.201 111.654,82.91 X47.26@111.654,77.729
spi_miso: X23.2 X47.21 | length 14.4
  Top Layer w0.508: X47.21@116.734,75.189 117.983,76.438 X23.2@117.983,89.027
spi_mosi: X23.1 X47.19 | length 14.9
  Top Layer w0.508: X47.19@119.274,75.189 121.793,77.708 X23.1@121.793,89.027
t_swo: R151.1 X22.6 | length 9.2
  Bottom Layer w0.203: X22.6@95.887,41.783 R151.1@95.887,51.029
vd1: R1.2 VD1.2 | length 2
  Top Layer w0.305: VD1.2@33.041,94.747 R1.2@33.041,96.778
vd2: R5.2 VD2.2 | length 2
  Top Layer w0.305: VD2.2@33.193,90.554 R5.2@33.193,92.562
vd3: R9.2 VD3.2 | length 2.2
  Top Layer w0.305: VD3.2@32.914,85.984 33.038,86.108 R9.2@33.038,88.145
vd4: R16.2 VD4.2 | length 2.2
  Top Layer w0.508: VD4.2@32.914,81.285 32.914,82.307 33.038,82.431 R16.2@33.038,83.446
vd5: R20.2 VD5.2 | length 2.2
  Top Layer w0.508: VD5.2@32.914,76.967 32.914,78.11 33.038,78.234 R20.2@33.038,79.128
vd6: R24.2 VD6.2 | length 2.2
  Top Layer w0.508: VD6.2@32.914,72.522 32.914,73.538 33.038,73.662 R24.2@33.038,74.683
vd7: R31.2 VD7.2 | length 2.2
  Top Layer w0.508: VD7.2@32.914,67.95 32.914,68.966 33.038,69.09 R31.2@33.038,70.111
vd8: R35.2 VD8.2 | length 2.2
  Top Layer w0.508: VD8.2@32.914,63.505 32.914,64.527 33.038,64.651 R35.2@33.038,65.666
vd9: R39.2 VD9.2 | length 2.2
  Top Layer w0.508: VD9.2@32.914,58.933 32.914,59.955 33.038,60.079 R39.2@33.038,61.094
vd10: R46.2 VD10.2 | length 2.2
  Top Layer w0.508: VD10.2@32.914,53.853 32.914,54.869 32.917,54.872 33.038,54.872 R46.2@33.038,55.887
vd11: R50.2 VD11.2 | length 2.2
  Top Layer w0.508: VD11.2@32.914,49.281 32.914,50.43 33.038,50.554 R50.2@33.038,51.442
vd12: R54.2 VD12.2 | length 2
  Top Layer w0.508: VD12.2@33.038,44.96 R54.2@33.038,46.997
vd13: R61.2 VD13.2 | length 2.3
  Top Layer w0.508: VD13.2@32.914,39.629 33.038,39.753 R61.2@33.038,41.917
vd14: R65.2 VD14.2 | length 2.2
  Top Layer w0.508: VD14.2@32.914,35.184 32.914,36.079 33.038,36.203 R65.2@33.038,37.345
vd15: R69.2 VD15.2 | length 2.3
  Top Layer w0.508: VD15.2@32.914,30.485 32.914,31.755 33.038,31.879 R69.2@33.038,32.773
vd16: R173.2 VD16.2 | length 2.2
  Top Layer w0.508: VD16.2@32.914,25.786 32.893,25.807 32.893,26.924 33.038,27.069 R173.2@33.038,27.947
vd17: R179.2 VD17.2 | length 2.2
  Top Layer w0.508: VD17.2@32.914,21.214 32.914,22.23 33.038,22.354 R179.2@33.038,23.375
vd18: 
vd19: R187.2 VD19.2 | length 2.2
  Top Layer w0.508: VD19.2@32.914,11.943 32.914,13.086 33.038,13.21 R187.2@33.038,14.104
vd20: R191.2 VD20.2 | length 2.2
  Top Layer w0.508: VD20.2@32.893,7.392 32.893,8.509 33.038,8.654 R191.2@33.038,9.532
vd21: R195.2 VD21.2 | length 2.2
  Top Layer w0.508: VD21.2@32.914,3.053 32.914,4.196 33.038,4.32 R195.2@33.038,5.214
vd22: 
vd23: 
vd24: 
vd25: 
vd26: 
vd27: 
vd28: 
vd29: 
vd30: 
vd36: R121.1 VD36.1 | length 2.5
  Top Layer w0.508: VD36.1@179.197,97.028 R121.1@181.737,97.028
vd37: R124.1 VD37.1 | length 2
  Top Layer w0.508: VD37.1@160.676,83.317 R124.1@162.708,83.317
vd38: R125.1 VD38.1 | length 1.3
  Top Layer w0.508: VD38.1@128.27,85.852 R125.1@129.54,85.852
vd39: R126.1 VD39.1 | length 2.3
  Top Layer w0.508: VD39.1@151.638,96.52 R126.1@153.924,96.52
vd41: R153.2 VD41.2 | length 1.8
  Top Layer w0.305: VD41.2@84.203,45.083 R153.2@85.982,45.083
vd42: R152.2 VD42.2 | length 1.8
  Top Layer w0.305: VD42.2@84.201,47.371 84.203,47.369 R152.2@85.982,47.369
vd44: R139.2 VD44.1 | length 2.5
  Top Layer w0.508: VD44.1@147.32,16.51 R139.2@149.861,16.51
vd45: R140.2 VD45.1 | length 2.5
  Top Layer w0.508: VD45.1@147.32,19.05 R140.2@149.861,19.05
vdaa: C36.1 C37.1 DD8.22 R145.1 R146.2 | length 10.6
  Top Layer w0.203: DD8.22@112.481,45.339 112.481,46.396 113.157,47.072 v2(113.157,47.244)
  Bottom Layer w0.508: R146.2@110.868,44.575 R145.1@113.132,44.575 R145.1@113.259,44.575 ; R145.1@113.157,44.6 v2(113.157,47.244) ; v2@113.159,47.246 C36.1@113.159,48.489 C37.1@115.318,48.489
vref+: C34.1 C35.1 DD8.21 R145.2 | length 13.5
  Top Layer w0.203: v2(110.998,47.244) 111.506,47.244 111.981,46.769 DD8.21@111.981,45.339 111.981,43.848 113.538,42.291 v2(114.935,42.291)
  Bottom Layer w0.508: C34.1@108.714,48.489 C35.1@111,48.489 v2@111,47.246 ; v2@114.932,42.294 R145.2@114.932,44.575
x1-2: X1.2 X6.1 X6.6 | length 20.3
  Top Layer w0.152: 24.913,93.731 26.31,93.731
  Top Layer w0.203: 26.31,93.731 X6.6@26.945,94.366
  Top Layer w0.254: 17.547,90.175 17.547,91.89 19.389,93.731 23.77,93.731 ; 24.913,93.731 23.77,93.731 ; X6.1@25.675,96.906 23.77,96.906 23.77,93.731
  Top Layer w0.813: X1.2@17.547,87.127 17.547,90.175
x1-3: X1.3 X6.7 X6.12 | length 24.4
  Top Layer w0.152: 25.04,89.921 26.31,89.921
  Top Layer w0.203: 26.31,89.921 X6.12@26.945,90.556
  Top Layer w0.254: 16.15,84.714 22.754,84.714 23.643,85.603 23.643,89.921 ; 25.04,89.921 23.643,89.921 ; X6.7@25.675,93.096 23.643,93.096 23.643,89.921
  Top Layer w0.813: X1.3@13.737,87.127 16.15,84.714